# EAGLE board LevelShifter (EAGLE 9.4.2)
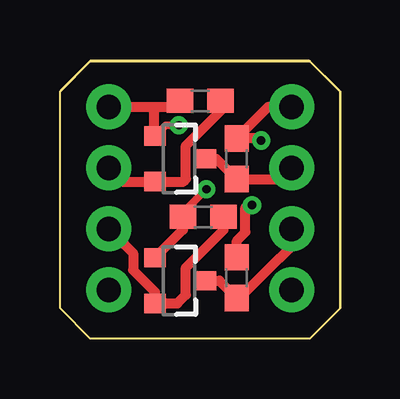
[diagram p0: board, top side]
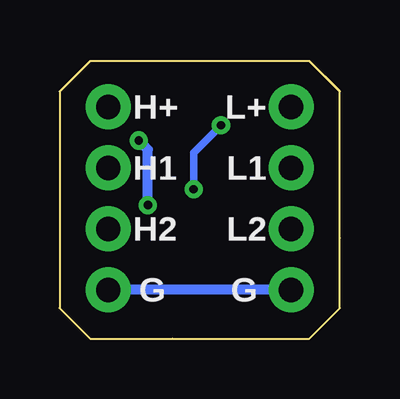
[diagram p1: board, bottom side, seen from below]

Size 11.66 x 11.61 mm. Coordinates in mm from the lower left corner, seen from the top.
Outline: 0,10.34 0,1.27 1.27,0 10.39,0 11.66,1.27 11.66,10.34 10.39,11.61 1.27,11.61 0,10.34
Copper layers (1*16): Top 0.035mm / dielectric 1.5mm / Bottom 0.035mm
Design rules "default": minimum track width 6mil, minimum drill 0.35mm, track to track 6mil, track to pad 6mil, pad to pad 6mil, via to via 6mil, smd to smd 6mil, copper to edge 40mil, drill to drill 6mil, minimum pad ring 10mil, minimum via ring 8mil, stop-mask expansion 4mil, vias tented up to drill 0mil, thermal gap 10mil
Milling: 10 lines

## Footprints (pad centres in the part's own frame; a part is rotated, then mirrored left to right if it is on the bottom)
1X04_NO_SILK = drill 1.016 pad 1.88: 1 0,0; 2 2.54,0; 3 5.08,0; 4 7.62,0
SOT23-3 = smd 0.8 x 0.9: 1 -0.95,-1; 2 0.95,-1; 3 0,1.1
0603 = smd 1.1 x 1: 1 -0.85,0; 2 0.85,0

## Placement (x,y rotation side)
J1  [1X04_NO_SILK]  2.03,2.03 90 top
J2  [1X04_NO_SILK]  9.65,9.65 270 top
Q1  220mA/50V/3.5Ω  [SOT23-3]  4.95,7.49 270 top
Q2  220mA/50V/3.5Ω  [SOT23-3]  4.95,2.41 270 top
R1  10k  [0603]  5.84,9.91 180 top
R2  10k  [0603]  5.97,5.08 180 top
R3  10k  [0603]  7.37,7.49 90 top
R4  10k  [0603]  7.37,2.54 90 top

## Library data of the parts
J1 J2 = SparkFun-Connectors; PROD_ID: CONN-09696
Q1 Q2 = SparkFun-DiscreteSemi; PROD_ID: TRANS-00830
R1-R4 = SparkFun-Resistors; PROD_ID: RES-07856

## Nets
GND: J1.1 J2.4
HI1: J2.2 Q1.3 R3.1
HI2: J2.3 Q2.3 R4.1
HIPW: J2.1 R3.2 R4.2
LOW1: J1.3 Q1.2 R1.1
LOW2: J1.2 Q2.2 R2.1
LOWPW: J1.4 Q1.1 Q2.1 R1.2 R2.2

## Tracks (layer width: path | path; a pad name or v marks a point on that pad's centre or on a via)
GND
  Bottom 0.406: J1.1 J2.4
HI1
  Top 0.406: Q1.3 6.52,7.49 R3.1 9.18,6.64 J2.2
HI2
  Top 0.406: Q2.3 6.64,2.41 R4.1 7.48,1.69 9.11,3.33 9.13,3.33 9.65,3.85 J2.3
HIPW  (via drill 0.35)
  Top 0.406: J2.1 8.68,9.65 R3.2 8.29,8.34 v8.38,8.26 | R4.2 7.37,4.07 7.73,4.43 7.73,5.46 7.83,5.56 v8,5.56
  Top 0.61: R4.2 7.29,3.47
  Bottom 0.406: v8,5.56 8,7.87 v8.38,8.26
LOW1
  Top 0.406: J1.3 2.6,6.54 Q1.2 5.15,6.54 5.25,6.64 5.25,8.04 6.69,9.48 R1.1
LOW2
  Top 0.406: J1.2 3.05,3.56 3.05,2.85 3.95,1.94 Q2.2 4.89,1.46 5.25,1.82 5.25,2.96 6.82,4.53 R2.1
LOWPW  (via drill 0.35)
  Top 0.305: Q1.1 4.4,8.89 v4.95,8.89 | v6.1,6.22 5.12,5.25 R2.2
  Top 0.406: J1.4 3.94,9.65 | 3.94,9.65 4.74,9.65 R1.2 | Q1.1 3.94,8.46 3.94,9.65 | Q2.1 5.12,4.53 R2.2
  Bottom 0.305: v4.95,8.89 6.1,7.75 v6.1,6.22

## Text on the board
bPlace: L+ | H+ | L1 | H1 | L2 | H2 | G | G